# Altium PCB ProjectPCB1.PcbDoc
Units mm, origin at the board's own origin, x right, y up, seen from the top; angles counter-clockwise.
Board outline 35 x 36 mm, 2 copper layers (Top Layer, Bottom Layer); 18 components, 19 nets, 57 pads, 0 vias.
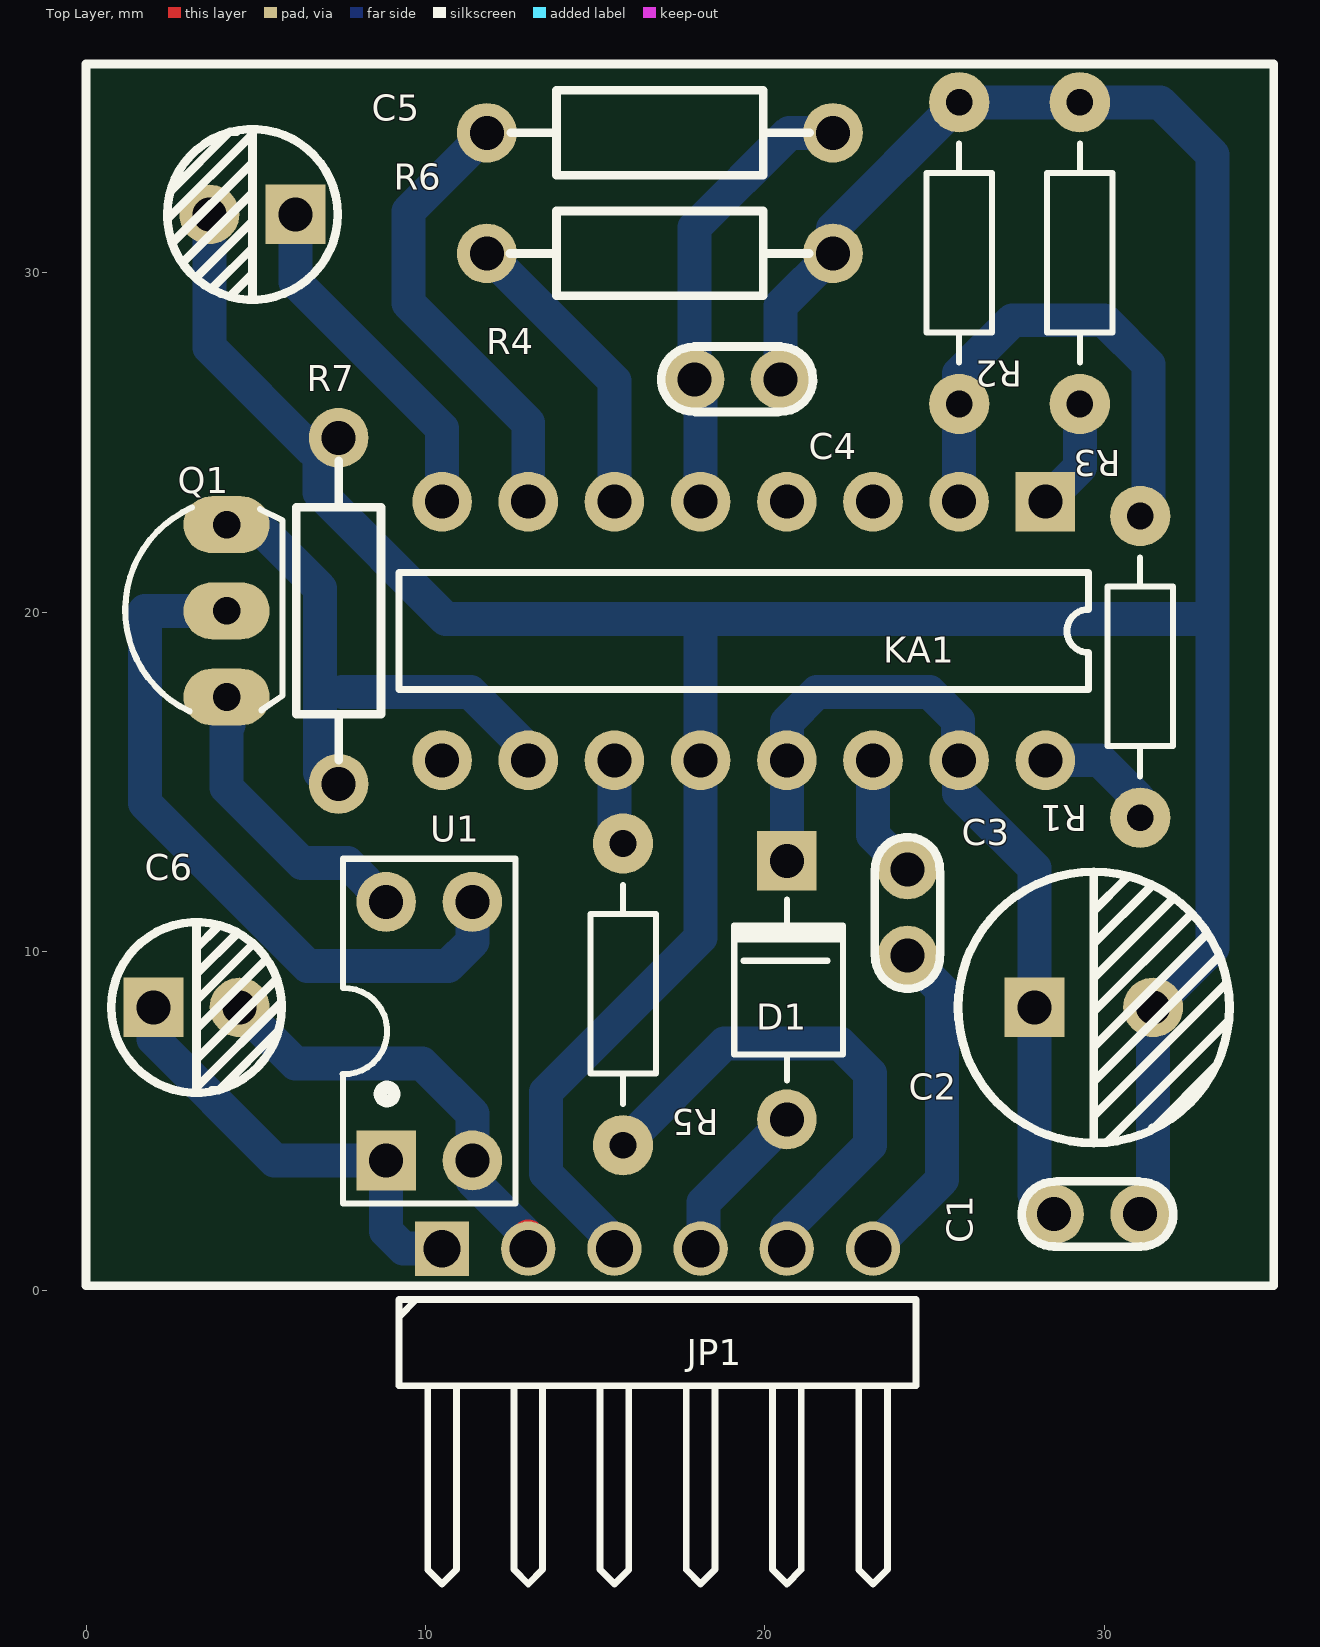
[diagram p0: Top Layer view]
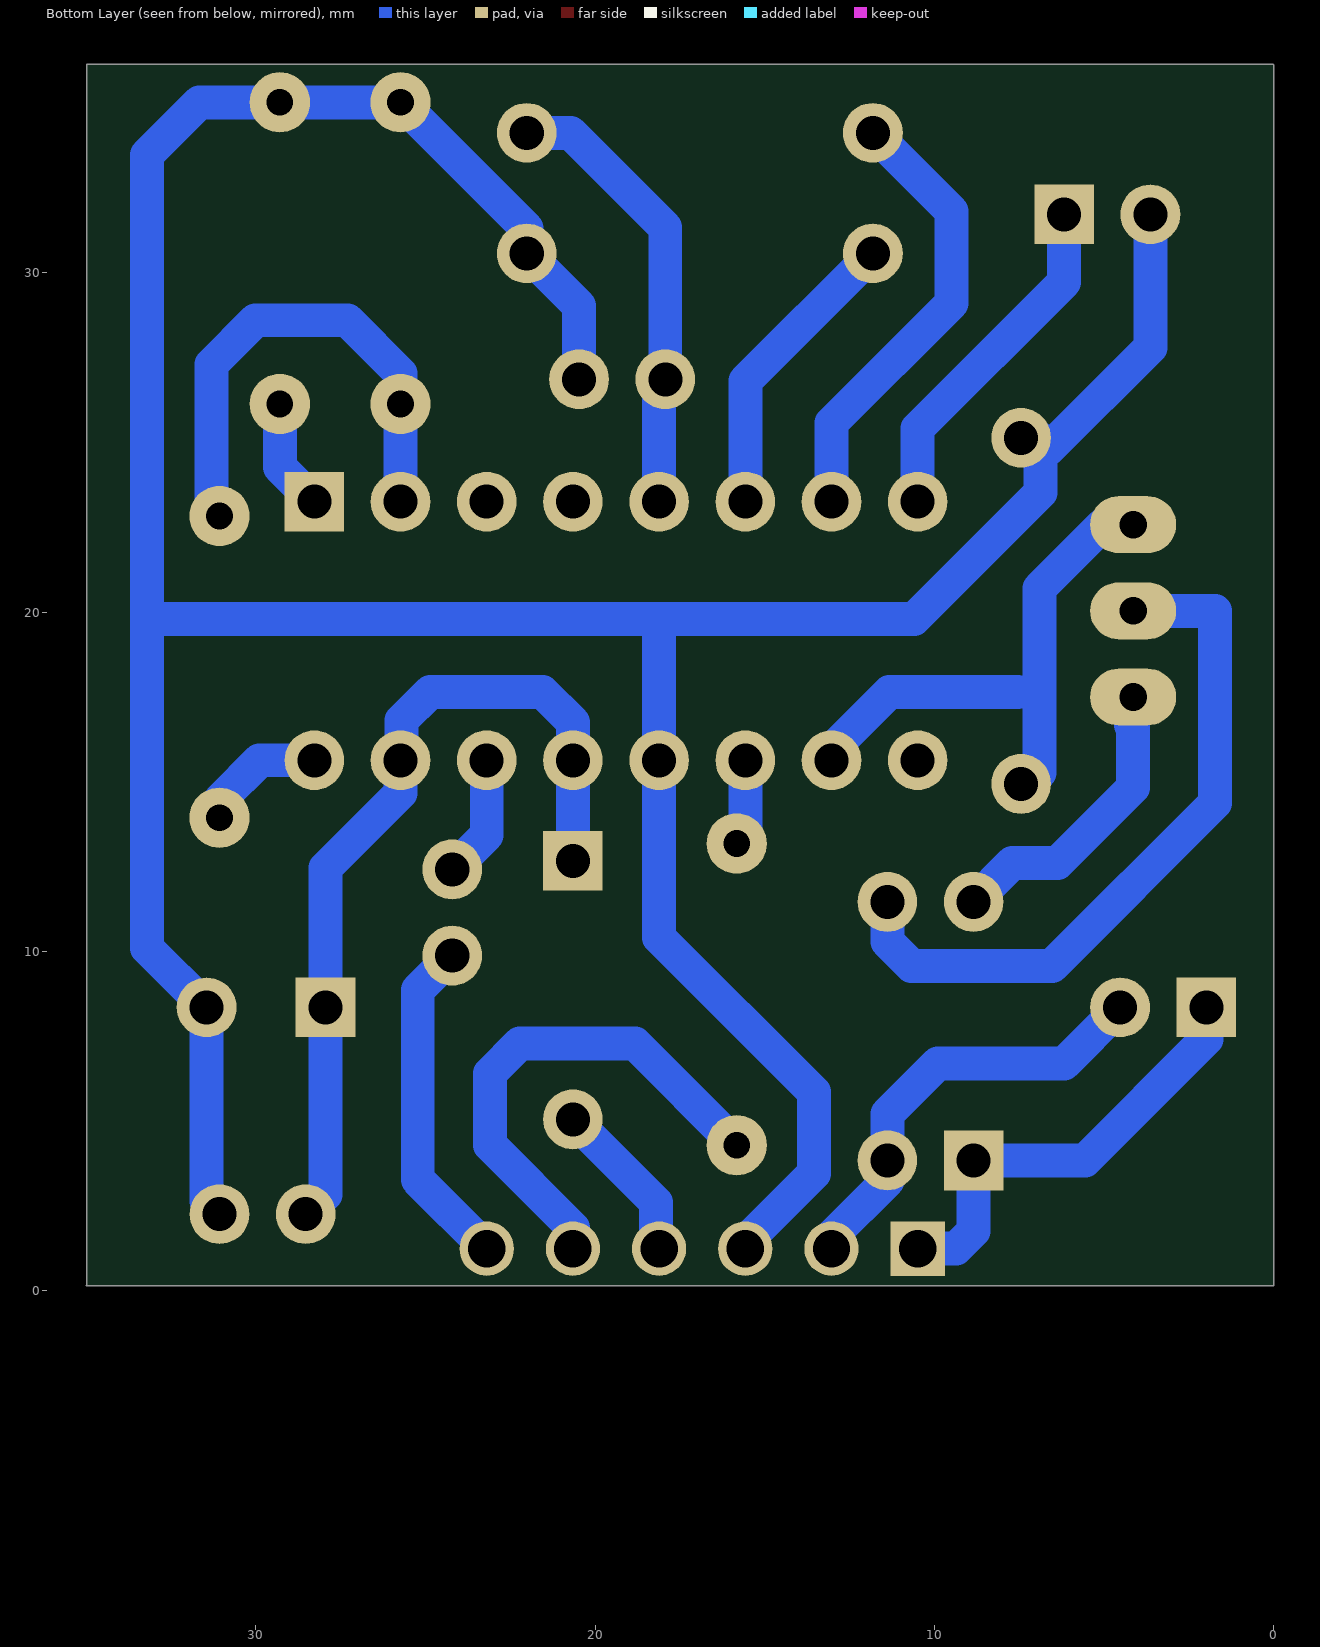
[diagram p1: Bottom Layer view, seen from below]
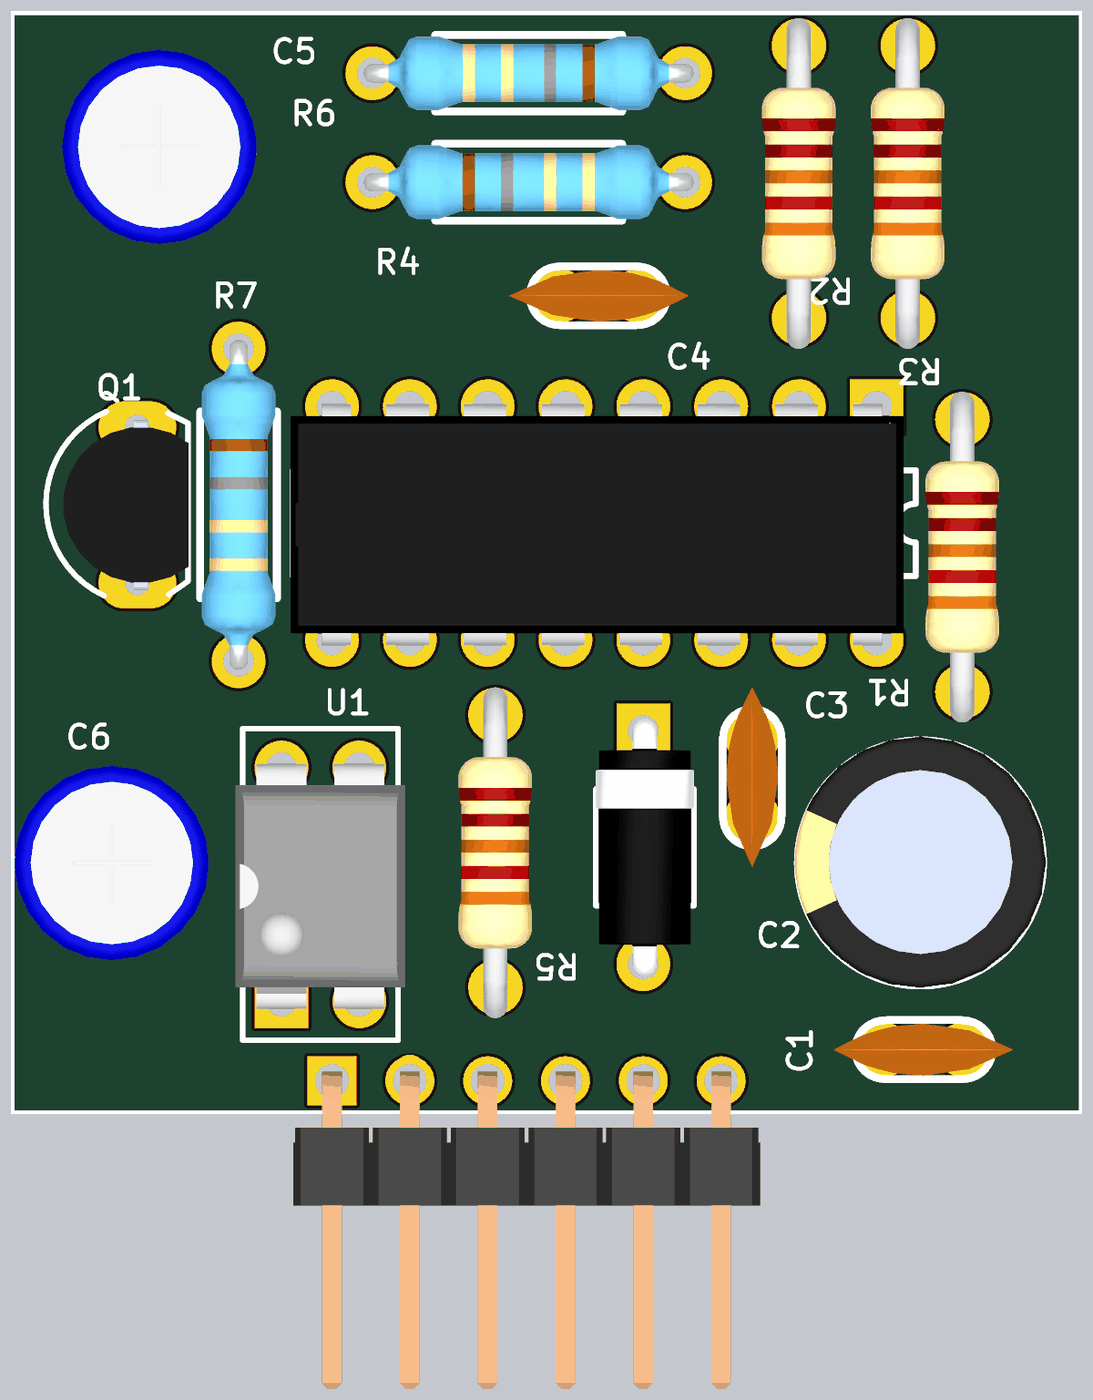
[diagram p2: 3D render of the assembled board from above, using the file's embedded part models]

## Layer stack, top to bottom
Top Layer: signal copper 0.0356
Dielectric: dielectric 0.32, FR-4, Dk 4.8
Bottom Layer: signal copper 0.0356

## Board outline
0.025,36.15 0,36.125 0,0.15 35,0.15 34.975,0.175 34.975,36.15 0.025,36.15

## Design rules (kind name [scope] priority, off if disabled: settings)
Clearance [All] p1: gap=0.381
HoleSize [All] p1: absolutevalues=TRUE maxlimit=3.81 minlimit=0.025 maxpercent=80.000 minpercent=20.000
PolygonConnect [All] p1: connectstyle=Relief reliefconductorwidth=0.254 reliefentries=4 polygonreliefangle="90 Angle"
RoutingVias [All] p1: holewidth=0.711 width=1.27 viastyle="Through Hole" minholewidth=0.711 minwidth=1.27 maxholewidth=0.711 maxwidth=1.27
ShortCircuit [All] p1: allowed=TRUE
SilkscreenOverComponentPads [All] p1: minsilkscreentomaskgap=0.254
SolderMaskExpansion [All] p1: expansion=0.102
Width [All] p1: maxlimit=2.54 minlimit=0.254 preferedwidth=0.991
25 further rules are at their usual default settings.

## Components (designator, comment, footprint, x,y, rotation, side; value= is the part's Value field where it differs from the comment)
C1 "104" "tu gom" 29.796,2.256 r180 top
C2 "220nF" "tu hoa 8mm" 29.697,8.352 r0 top
C3 "104" "tu gom" 24.208,11.146 r90 top
C4 "222" "tu gom" 19.2,26.86 r0 top
C5 "1uF" "tu hoa 5mm"#1 4.904,31.72 r180 top
C6 "4.7uF" "tu hoa 5mm"#2 3.256,8.348 r0 top
D1 "100v" "DIODE 1A" 20.652,3.78 r270 top
JP1 "JP 1x6 2.54" "JP 1x6 DC" 24.462,-1.3 r0 top
KA1 "KA3525" KA3525-DIP16 28.272,23.252 r270 top
Q1 "SCR" QTO-92 4.142,20.036 r90 top
R1 "Res1" R1/4W 31.066,13.94 r90 top
R2 "Res1" R1/4W 29.288,26.132 r90 top
R3 "Res1" R1/4W 25.732,26.132 r90 top
R4 "330R" "tro vach 1/4w" 16.912,30.568 r180 top
R5 "Res1" R1/4W 15.826,4.288 r90 top
R6 "2.2k" "tro vach 1/4w" 16.912,34.124 r0 top
R7 "2.2k" "tro vach 1/4w" 7.444,20.036 r90 top
U1 "OPTO PC817 DIP4" DIP4 8.844,3.776 r0 top

## Footprints (in the part's own frame and the unit in brackets; to place one, negate y for a bottom-side part, rotate by r counter-clockwise, add the part's x,y. Pads: shape width x height; smd on the part's side, far side on the other; paste and mask are expansions set on the pad)
"DIODE 1A" [mm] "Diode 1A"
  oval 1.763x1.756 hole 1.003 unplated: 1(-1.27,0)
  rect 1.763x1.756 hole 1.003 unplated: 2(-8.89,0)
  silkscreen extent -7.75,-1.55 -2.41,1.65, body extent -9.29,-1.55 -0.87,1.65, height 3.1
DIP4 [mm] "W.300/L.400"
  rect 1.756x1.763 hole 1.003 unplated: 1(0,0.064)
  oval 1.756x1.763 hole 1.003 unplated: 2(2.54,0.064) 3(2.54,7.684) 4(0,7.684)
  silkscreen extent -1.28,-1.21 3.81,8.95, body extent -1.5,-0.19 4.04,7.81, height 4.31
"JP 1x6 DC" [mm] "6 pins, 1 row, right angled, gold plating"
  rect 1.6x1.6 hole 1.1: 1(-13.97,2.54)
  round 1.6 hole 1.1: 2(-11.43,2.54) 3(-8.89,2.54) 4(-6.35,2.54) 5(-3.81,2.54) 6(-1.27,2.54)
  silkscreen extent -15.24,-7.34 0,1.04, body extent -15.24,-7.52 0,2.84, height 2.54
KA3525-DIP16 [mm]
  rect 1.763x1.756 hole 1.003 unplated: 1(0,0)
  oval 1.763x1.756 hole 1.003 unplated: 2(0,-2.54) 3(0,-5.08) 4(0,-7.62) 5(0,-10.16) 6(0,-12.7) 7(0,-15.24) 8(0,-17.78) 9(7.62,-17.78) 10(7.62,-15.24) 11(7.62,-12.7) 12(7.62,-10.16) 13(7.62,-7.62) 14(7.62,-5.08) 15(7.62,-2.54) 16(7.62,0)
  silkscreen extent 2.09,-19.05 5.53,1.27, body extent -0.08,-19.13 7.79,0.87, height 5.1
QTO-92 [mil] "TO-92"
  oval 66x100 hole 32: 1(-100,0) 2(0,0) 3(100,0)
  silkscreen extent -117,-65 120,118, body extent -109,-66 109,95, height 245
R1/4W [mil] "R 1/4W, 2 Pin, 350mil"
  round 70 hole 31: 1(0,0) 2(350,0)
  silkscreen extent 48,-38 302,38, body extent -40,-47 386,47, height 111
"tro vach 1/4w" [mm]
  oval 1.763x1.756 hole 1.003 unplated: 1(-5.1,0) 2(5.1,0)
  silkscreen extent -4.39,-1.25 4.42,1.25, body extent -5.38,-1.2 5.38,1.2, height 2.41
"tu gom" [mm] "Tu gom mini"
  oval 1.763x1.756 hole 1.003 unplated: 1(-1.27,0) 2(1.27,0)
  silkscreen extent -2.25,-0.97 2.22,0.97, body extent -2.92,-0.85 2.92,0.85, height 6.12
"tu hoa 5mm"#1 [mm]
  rect 1.763x1.756 hole 1.003 unplated: 1(-1.27,0)
  oval 1.763x1.756 hole 1.003 unplated: 2(1.27,0)
  silkscreen extent -2.51,-2.51 2.51,2.51, body extent -3.12,-3.18 3.23,3.18, height 14.55
"tu hoa 5mm"#2 [mm]
  rect 1.763x1.756 hole 1.003: 1(-1.27,0)
  oval 1.763x1.756 hole 1.003: 2(1.27,0)
  silkscreen extent -2.51,-2.51 2.51,2.51, body extent -3.12,-3.18 3.23,3.18, height 14.55
"tu hoa 8mm" [mm]
  rect 1.763x1.756 hole 1.003 unplated: 1(-1.75,0)
  oval 1.763x1.756 hole 1.003 unplated: 2(1.75,0)
  silkscreen extent -4,-4 4,4, body extent -4.1,-4.07 4.1,4.13, height 13.81

## Part data
C1 C3: library part "Tu gom 104 50V", "C?m"
C2: library part "Tu Hoa 220uF 35V 8x12", "C?m"
C4: library part "Tu gom 222 50V", "C?m"
C5: library part "Tu Hoa 1uF 50V 5x11", "C?m"
C6: library part "Tu Hoa 4.7uF 50V 5x11", "C?m"
D1: library part "Diode 1N4007", "C?m"
JP1: library part "JP 1x6 2.54 Duc Cong", "C?m"
Q1: "Silicon Controlled Rectifier"
R1 R2 R3 R5: library part Res1_1, "Resistor"
R4: library part "Tro Vach 1/4W 1% 330R", "C?m"
R6 R7: library part "Tro Vach 1/4W 5% 2.2k", "C?m"
U1: "Single Opto"

## Nets (pads, with @x,y where several pads share a name; then routed paths per layer and width w, separated by ;. In a path a pad name is that pad's centre, name@x,y a point inside that pad or via, vN(x,y) a via of type N, cw(c..) or ccw(c..) an arc to the next point about the centre after c; other vN are vias at no path point)
+12V: Q1.1 U1.4 | length 8.8
  Bottom Layer w1: Q1.1 Q1.1@4.142,16.734 ; Q1.1@4.2,16.676 Q1.1@4.142,16.734 ; U1.4 7.704,12.6 6.368,12.6 4.142,14.826 Q1.1@4.142,16.734
GND: C1.1 C2.2 C4.2 C5.2 JP1.3 KA1.12 R2.2 R3.2 R4.1 R7.2 | length 109.5
  Bottom Layer w1: C5.2 3.634,27.802 6.618,24.818 ; R7.2@6.936,25.136 6.875,25.075 6.875,23.525 10.6,19.8 18.1,19.8 ; JP1.3 15.572,1.432 13.553,3.452 13.553,5.853 18.112,10.412 KA1.12 18.112,19.788 18.1,19.8 ; C4.2 20.47,29.026 R4.1 22.012,31.302 R3.2 26.16,35.022 R2.2 31.654,35.022 33.2,33.476 33.2,19.8 ; C1.1 31.447,2.637 C2.2 33.2,10.105 33.2,19.8 ; 18.1,19.8 33.2,19.8
NetC1_2: C1.2 C2.1 D1.2 KA1.13 KA1.15 | length 25.6
  Bottom Layer w1: D1.2 20.652,13.326 KA1.13 20.652,16.752 21.544,17.644 24.856,17.644 25.7,16.8 25.7,15.664 KA1.15 25.732,14.668 27.947,12.453 C2.1 27.947,2.835 C1.2
NetC3_1: C3.1 JP1.6 | length 9.9
  Bottom Layer w1: JP1.6 25.224,3.272 25.224,8.86 C3.1
NetC3_2: C3.2 KA1.14 | length 3.6
  Bottom Layer w1: KA1.14 23.192,13.432 C3.2
NetC4_1: C4.1 KA1.5 R6.2 | length 13.4
  Bottom Layer w1: KA1.5 18.112,26.678 C4.1 17.93,31.33 20.724,34.124 R6.2
NetC5_1: C5.1 KA1.8 | length 10.3
  Bottom Layer w1: C5.1 6.174,30.1 6.174,29.726 10.492,25.408 KA1.8
NetC6_1: C6.1 JP1.1 U1.1 | length 12.7
  Bottom Layer w1: C6.1 1.986,7.414 5.56,3.84 U1.1@8.36,3.84 ; U1.1 8.844,1.756 9.36,1.24 JP1.1
NetC6_2: C6.2 JP1.2 U1.2 | length 12.9
  Top Layer w1: JP1.2 JP1.2@13.032,1.593
  Bottom Layer w1: C6.2 6.174,6.7 9.9,6.7 11.384,5.216 U1.2 11.384,3.241 JP1.2@13.032,1.593 ; JP1.2@12.962,1.17 JP1.2@13.032,1.1
NetJP1_5: JP1.5 R5.1 | length 15.1
  Bottom Layer w1: R5.1 18.819,7.281 22.219,7.281 23.1,6.4 23.1,4.3 20.652,1.852 JP1.5
NetKA1_1: KA1.1 R2.1 | length 3.3
  Bottom Layer w1: KA1.1 29.288,24.268 R2.1
NetKA1_2: KA1.2 R1.2 R3.1 | length 15.1
  Bottom Layer w1: KA1.2 R3.1 25.732,27.032 27.3,28.6 30.007,28.6 31.307,27.3 31.307,23.071 R1.2
NetKA1_6: KA1.6 R4.2 | length 8.9
  Bottom Layer w1: R4.2 15.572,26.808 KA1.6
NetKA1_7: KA1.7 R6.1 | length 13.3
  Bottom Layer w1: R6.1 9.5,31.812 9.5,29.1 13.032,25.568 KA1.7
NetKA1_10: KA1.10 Q1.3 R7.1 | length 16.1
  Bottom Layer w1: Q1.3@3.528,22.572 5.028,22.572 6.9,20.7 R7.1@6.9,15.264 ; 7.556,17.644 11.324,17.644 13.032,15.936 KA1.10
NetKA1_11: KA1.11 R5.2 | length 2.6
  Bottom Layer w1: KA1.11 15.572,13.432 R5.2
NetKA1_16: KA1.16 R1.1 | length 3.8
  Bottom Layer w1: KA1.16 28.612,15.632 29.882,15.632 R1.1@31.007,14.507 ; R1.1@31,14.5 31.066,14.434 R1.1
NetQ1_2: Q1.2 U1.3 | length 20.5
  Bottom Layer w1: 1.852,20.032 1.732,20.032 ; Q1.2@3.38,20.036 3.376,20.032 1.732,20.032 ; U1.3 11.384,10.284 10.675,9.575 6.525,9.575 1.732,14.368 1.732,20.032
VCC: D1.1 JP1.4 | length 4.9
  Bottom Layer w1: JP1.4 18.112,1.5 18.202,1.59 18.202,2.6 D1.1
pads on no net: KA1.3 KA1.4 KA1.9

## Silkscreen, mask and mechanical layers (free items; w line width, h text height)
Top Overlay:
  lines w0.254: 0,0.15 0,36.15 35,36.15 35,0.15 0,0.15